# Altium PCB HGD_MCU(v0.1)-20200807.PcbDoc
Units mil, origin at the board's own origin, x right, y up, seen from the top; angles counter-clockwise.
Board outline 2263.78 x 2460.63 mil, 2 copper layers (TopLayer, BottomLayer); 55 components, 43 nets, 248 pads, 448 vias.
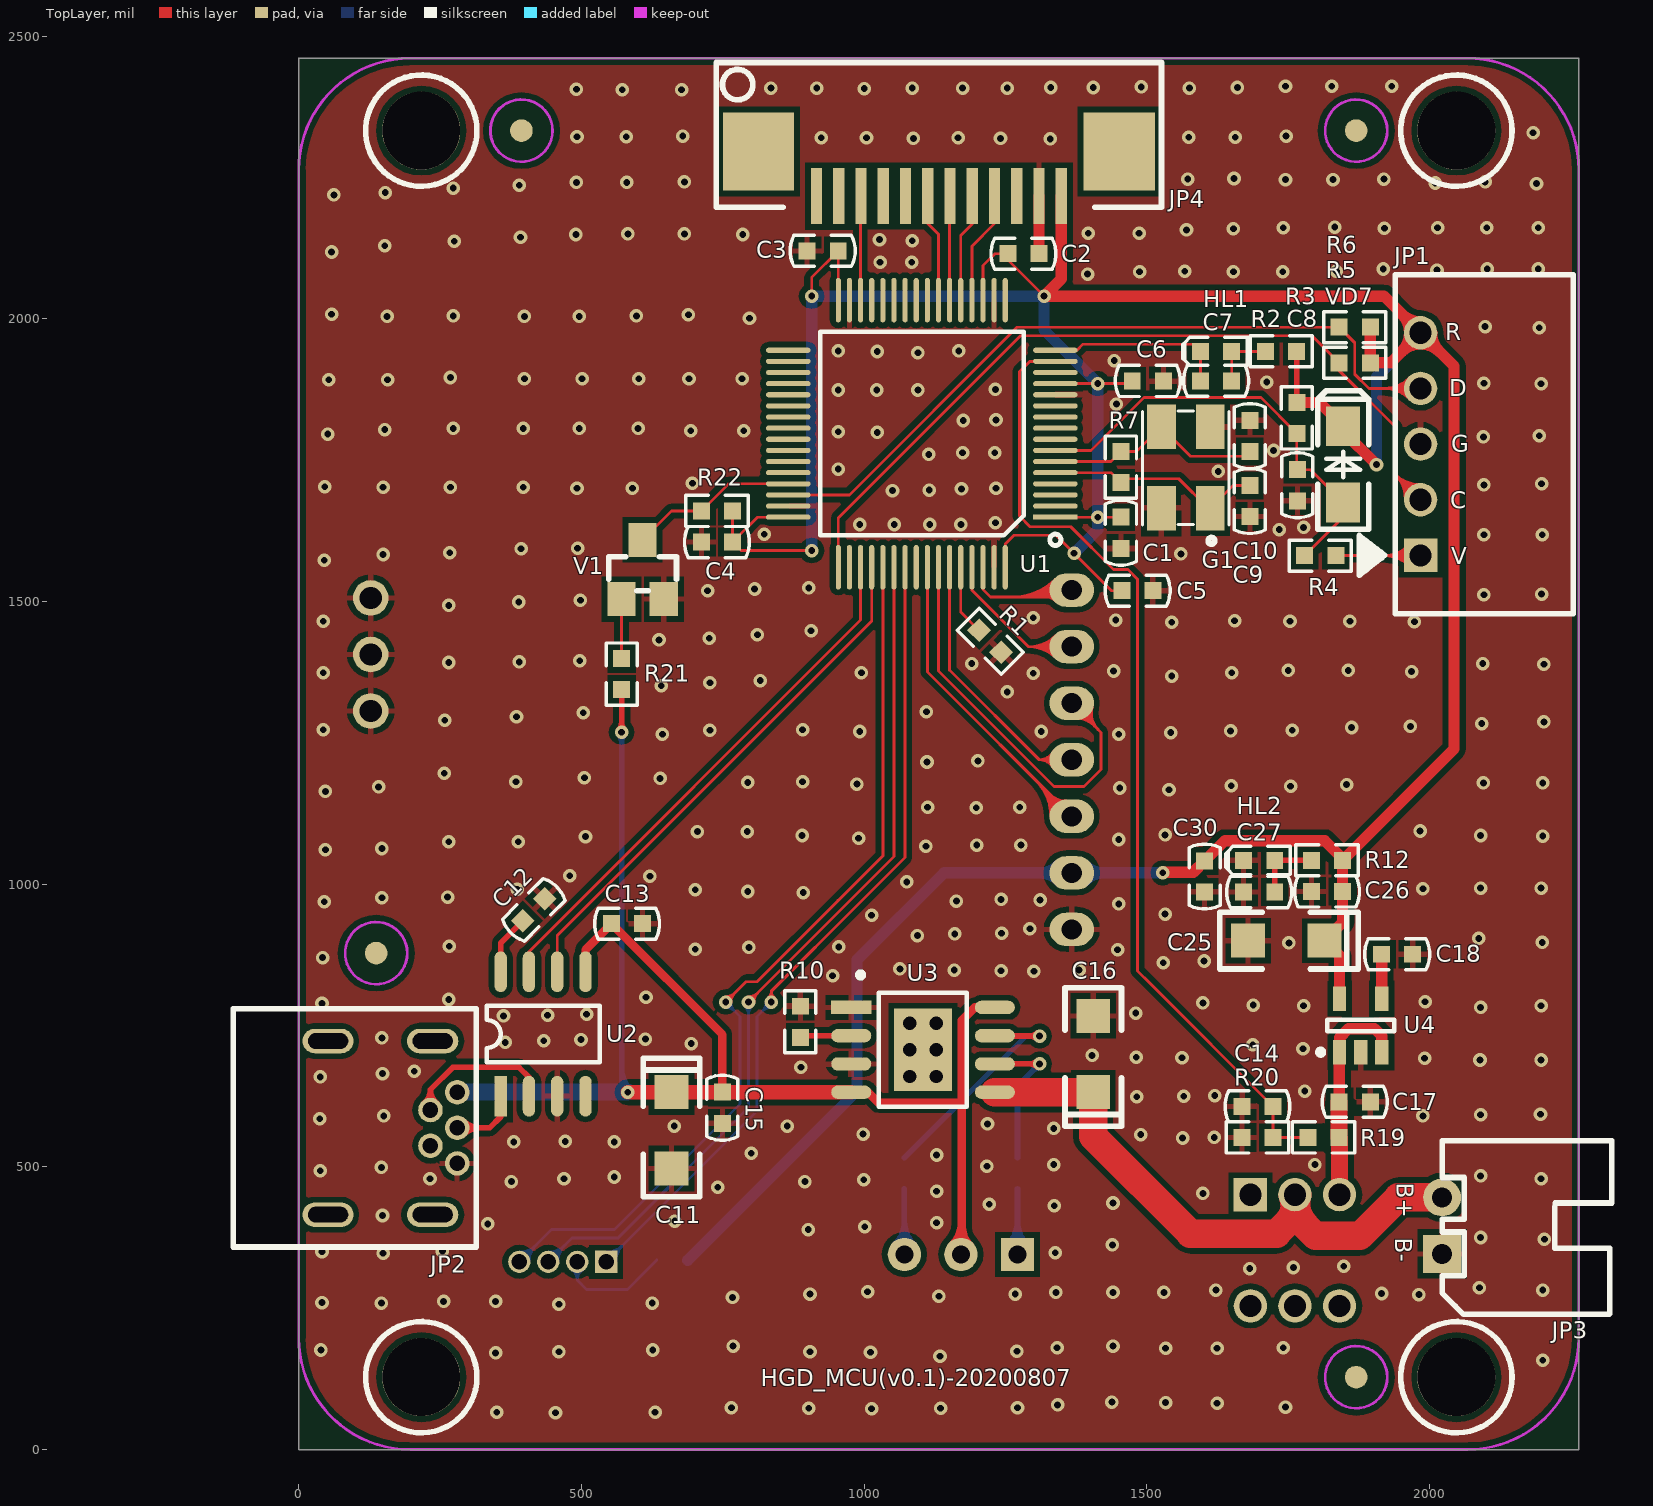
[diagram p0: TopLayer view]
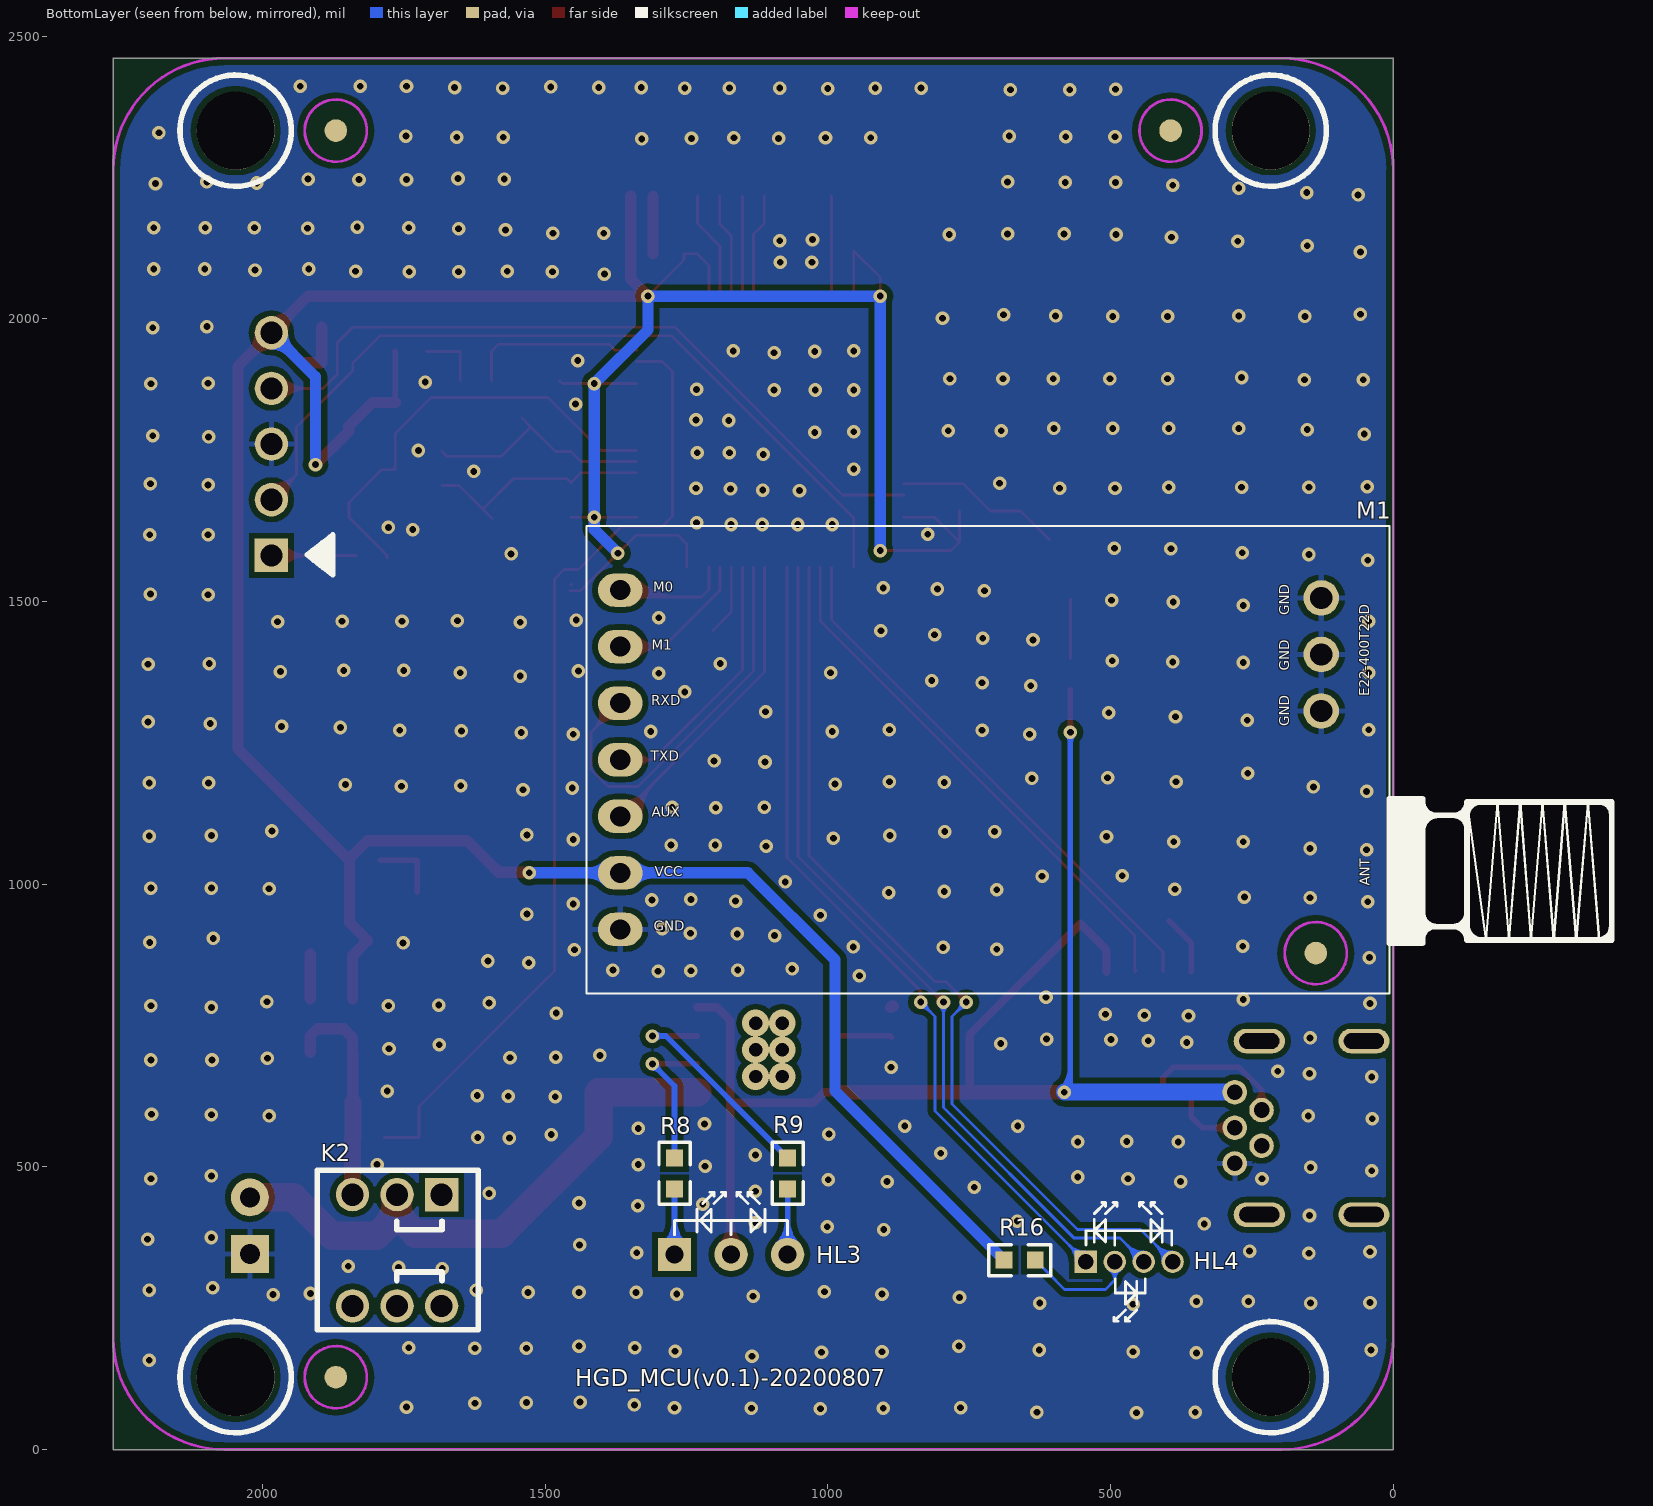
[diagram p1: BottomLayer view, seen from below]

## Layer stack, top to bottom
TopLayer: signal copper 1.4
Dielectric: core 12.6, FR-4, Dk 4.8
BottomLayer: signal copper 1.4

## Board outline
0,0 2263.78,0 2263.78,2460.63 0,2460.63 0,0

## Design rules (kind name [scope] priority, off if disabled: settings)
Clearance Clearance_2 [InNet('RF_IN') vs InNet('GND')] p1: gap=19.68
Clearance [All] p2: gap=10
Clearance Clearance_1 [All] p3: gap=10
ComponentClearance [All] p1 off: gap=10 collisioncheckmode=3 verticalgap=10 showdistances=FALSE
FabricationTestPointUsage TestPointUsage [All] p1: valid=0 allowmultiple=FALSE
FabricationTestpoint Testpoint [(IsPad And (OnTopLayer Or OnBottomLayer))] p1: side=3 testpointundercomponent=TRUE minsize=40 maxsize=100 preferedsize=60 minholesize=20 maxholesize=40 preferedholesize=32 testpointgrid=1 allowsidetop=TRUE allowsidebottom=TRUE usegrid=TRUE gridtolerance=0.01
HoleSize [All] p1: absolutevalues=TRUE maxlimit=200 minlimit=1 maxpercent=80.000 minpercent=20.000
PolygonConnect [IsVia] p1: connectstyle=Direct reliefconductorwidth=10 reliefentries=4 polygonreliefangle="90 Angle"
PolygonConnect PolygonConnect_via [All] p2 off: connectstyle=Relief reliefconductorwidth=10 reliefentries=4 polygonreliefangle="90 Angle"
RoutingVias [All] p1: holewidth=15.75 width=31.5 viastyle="Through Hole" minholewidth=11.81 minwidth=23.62 maxholewidth=19.68 maxwidth=39.37
ShortCircuit [All] p1 off: allowed=FALSE
SilkscreenOverComponentPads [All] p1: minsilkscreentomaskgap=10
SolderMaskExpansion [All] p1: expansion=4
Width [All] p1: maxlimit=100 minlimit=5 preferedwidth=10
22 further rules are at their usual default settings.

## Components (designator, comment, footprint, x,y, rotation, side; value= is the part's Value field where it differs from the comment)
C1 "100nF/25V/5%" C0603 1454,1594 r90 top
C2 "100nF/25V/5%" C0603 1254,2115 r0 top
C3 "100nF/25V/5%" C0603 954,2120 r180 top
C4 "100nF/25V/5%" C0603 712,1605 r0 top
C5 "100nF/25V/5%" C0603 1511,1519 r180 top
C6 "100nF/25V/5%" C0603 1529,1890 r180 top
C7 "100nF/25V/5%" C0603 1649.85,1890.25 r180 top
C8 "100nF/25V/5%" C0603 1766,1733 r270 top
C9 "20pF/25V/1%" C0603 1682,1650 r90 top
C10 "20pF/25V/1%" C0603 1682,1765 r90 top
C11 "10uF/25V/5%" C1206-1 659,632 r270 top
C12 "100nF/25V/5%" C0603 435,974 r225 top
C13 "100nF/25V/5%" C0603 553,930 r0 top
C14 "100nF/25V/5%" C0603 1723,607 r180 top
C15 "100nF/25V/5%" C0603 749,632 r270 top
C16 "10uF/25V/5%" C1206-1 1405,632 r90 top
C17 "100nF/25V/5%" C0603 1840,615 r0 top
C18 "10nF/25V/5%" C0603 1970,876 r180 top
C25 "2.2uF/25V/5%" C1206-1 1814,900 r180 top
C26 "100nF/25V/5%" C0603 1791,987 r0 top
C27 "100nF/25V/5%" C0603 1726,986 r180 top
C30 "100nF/25V/5%" C0603 1602,986 r90 top
G1 "16MHz" OSC5032 1612,1665 r90 top
HL1 "LED蓝灯" LED0603 1649.85,1942.25 r180 top
HL2 "LED蓝灯" LED0603 1726,1042 r180 top
HL3 "LED双色" LED2_Common_Anode 1271,345 r180 bottom locked
HL4 "LED3_RGB" LED3_Common_Anode 543.54,332 r180 bottom
JP1 "SWD" XH2.54-5AW 1984,1483 r90 top
JP2 "MiniUSB-B" MiniUSB-B 280,569 r270 top locked
JP3 "XH2.54-2P" XH2.54-2AW 2022,396 r90 top
JP4 "FPC-12P" FPC-1.0MM-12P-W 1132,2217 r0 top locked
K2 "SW-2" BTN-7*7 1683,254 r0 bottom locked
M1 "E22-400T22D" E22-400T22D 1367,1520 r180 bottom locked
R1 "10K/5%" R0603 1242,1410 r135 top
R2 "10K/5%" R0603 1764.85,1942.25 r180 top
R3 "10K/5%" R0603 1765,1797 r90 top
R4 "1K/5%" R0603 1834,1581 r180 top
R5 "10K/5%" R0603 1840,1922 r0 top
R6 "10K/5%" R0603 1840,1985 r0 top
R7 "1M/1%" R0603 1454,1710 r90 top
R8 "1K/5%" R0603 1271,516 r270 bottom
R9 "1K/5%" R0603 1071,516 r270 bottom
R10 "1K5/5%" R0603 887,784 r270 top
R12 "2K/5%" R0603 1846,1042 r180 top
R16 "10K/5%" R0603 688,335 r180 bottom
R19 "10M/1%" R0603 1840,552 r180 top
R20 "10M/1%" R0603 1723,552 r180 top
R21 "10K/5%" R0603 571,1399 r270 top
R22 "1K/5%" R0603 767,1660 r180 top
U1 "STM32F105RCT6" LQFP64_STM32F105R 1338,1649 r180 top locked
U2 "CH340N" CH340N_SOP8 357,625 r0 top
U3 "TP4056" TP4056_SOP8_SOP127P600X175-8N 1104,707 r0 top
U4 "TPS73033DBVR" SGM2019_SOT23-5_95P280X125-5N 1878,750 r90 top
V1 "S8050" SOT-23 608,1609 r0 top
VD7 "1N4148" LL-34 1847,1675 r90 top

## Footprints (in the part's own frame and the unit in brackets; to place one, negate y for a bottom-side part, rotate by r counter-clockwise, add the part's x,y. Pads: shape width x height; smd on the part's side, far side on the other; paste and mask are expansions set on the pad)
BTN-7*7 [mm] "自锁开关"
  rect 1.5x1.5 hole 1: 1(0,-5)
  round 1.5 hole 1: 2(2,-5) 3(4,-5) 4(0,0) 5(2,0) 6(4,0)
  silkscreen extent -1.65,-6.1 5.59,1.07
C0603 [mil]
  rect 30x30 smd: 1(0,0) 2(55,0)
  silkscreen extent -30,-28 85,28
C1206-1 [mil] "C1206封装钽电容"
  rect 60x60 smd: 1(0,0) 2(135,0)
  silkscreen extent -60,-50 185,50
CH340N_SOP8 [mil]
  rect 22x72 smd: 1(0,0)
  oval 22x72 smd: 2(50,0) 3(100,0) 4(150,0) 5(150,220) 6(100,220) 7(50,220) 8(0,220)
  silkscreen extent -25,60 175,160
E22-400T22D [mm]
  oval 2x1.5 hole 0.9: 1(0,0) 2(0,-2.54) 3(0,-5.08) 4(0,-7.62) 5(0,-10.16) 6(0,-12.7) 7(0,-15.24)
  round 1.6 hole 1: 8(31.49,-5.43) 9(31.49,-2.89) 10(31.49,-0.35)
  silkscreen extent -1.51,-18.12 44.54,2.88
FPC-1.0MM-12P-W [mm] "FPC-1.0MM-12P-W：卧式，抽拉式上接，12P"
  rect 3.2x3.5 smd: 0(-8.1,2) 0(8.1,2)
  rect 0.5x2.5 smd: 1(-5.5,0) 2(-4.5,0) 3(-3.5,0) 4(-2.5,0) 5(-1.5,0) 6(-0.5,0) 7(0.5,0) 8(1.5,0) 9(2.5,0) 10(3.5,0) 11(4.5,0) 12(5.5,0)
  silkscreen extent -10,-0.5 10,6
LED2_Common_Anode [mm] "LED2_Common_Anode：双色3mm共阳极LED"
  rect 1.5x1.5 hole 0.8: 1(0,0)
  round 1.5 hole 0.8: 2(2.54,0) 3(5.08,0)
  silkscreen extent 0,0.89 5.08,2.79
LED3_Common_Anode [mm] "LED2_Common_Anode：三色5mm共阳极LED"
  rect 1x1 hole 0.7: 1(0,0)
  round 1 hole 0.7: 2(1.3,0) 3(2.6,0) 4(3.9,0)
  silkscreen extent 0,-2.67 3.86,2.67
LED0603 [mil]
  rect 30x30 smd: A(0,0) K(55,0)
  silkscreen extent -28,-25 87,25
LL-34 [mil] "开关二极管LL-34封装"
  rect 70x60 smd: A(0,0) K(135,0)
  silkscreen extent -48,-45 198,45
LQFP64_STM32F105R [mm]
  rect 2x0.229 smd: 1(0,0)
  oval 2x0.229 smd: 2(0,-0.5) 3(0,-1) 4(0,-1.5) 5(0,-2) 6(0,-2.5) 7(0,-3) 8(0,-3.5) 9(0,-4) 10(0,-4.5) 11(0,-5) 12(0,-5.5) 13(0,-6) 14(0,-6.5) 15(0,-7) 16(0,-7.5) 33(12,-7.5) 34(12,-7) 35(12,-6.5) 36(12,-6) 37(12,-5.5) 38(12,-5) 39(12,-4.5) 40(12,-4) 41(12,-3.5) 42(12,-3) 43(12,-2.5) 44(12,-2) 45(12,-1.5) 46(12,-1) 47(12,-0.5) 48(12,0)
  oval 0.229x2 smd: 17(2.25,-9.75) 18(2.75,-9.75) 19(3.25,-9.75) 20(3.75,-9.75) 21(4.25,-9.75) 22(4.75,-9.75) 23(5.25,-9.75) 24(5.75,-9.75) 25(6.25,-9.75) 26(6.75,-9.75) 27(7.25,-9.75) 28(7.75,-9.75) 29(8.25,-9.75) 30(8.75,-9.75) 31(9.25,-9.75) 32(9.75,-9.75) 49(9.75,2.25) 50(9.25,2.25) 51(8.75,2.25) 52(8.25,2.25) 53(7.75,2.25) 54(7.25,2.25) 55(6.75,2.25) 56(6.25,2.25) 57(5.75,2.25) 58(5.25,2.25) 59(4.75,2.25) 60(4.25,2.25) 61(3.75,2.25) 62(3.25,2.25) 63(2.75,2.25) 64(2.25,2.25)
  silkscreen extent -0.25,-8.32 10.57,1.27
MiniUSB-B [mm]
  oval 1.1x2.3 hole 0.7 slot 1.8 at 90 deg: 0(-3.9,-1.1) 0(-3.9,-5.8) 0(3.9,-1.1) 0(3.9,-5.8)
  round 1.1 hole 0.7: 1(-1.6,0) 2(-0.8,-1.2) 3(0,0) 4(0.8,-1.2) 5(1.6,0)
  silkscreen extent -5.35,-10.05 5.35,0.85
OSC5032 [mm]
  rect 2x1.3 smd: 1(0,0) 2(3.65,0) 3(3.65,2.2) 4(0,2.2)
  silkscreen extent -1.62,-0.84 4.37,3.05
R0603 [mil]
  rect 30x30 smd: 1(0,0) 2(55,0)
  silkscreen extent -28,-28 82,28
SGM2019_SOT23-5_95P280X125-5N [mm] "SOT23, 5-Leads, Body 3.0x3.0mm (max), Pitch 0.95mm, IPC Medium Density"
  rect 1.1x0.6 smd: 1(-1.2,0.95) 2(-1.2,0) 3(-1.2,-0.95) 4(1.2,-0.95) 5(1.2,0.95)
  silkscreen extent -1.32,-1.5 0.25,1.92, body extent -0.85,-1.51 0.85,1.51, height 1.25
SOT-23 [mil]
  rect 50x60 smd: B(-37.5,-105) C(0,0) E(37.5,-105)
  silkscreen extent -60,-90 60,-30
TP4056_SOP8_SOP127P600X175-8N [mm] "SOP, 8-Leads, Body 5.1x4.0mm (max), Pitch 1.27mm, IPC Medium Density"
  rect 2.6x3.7 smd: 0(0,0)
  rect 1.8x0.6 smd: 1(-3.225,1.905)
  oval 1.8x0.6 smd: 2(-3.225,0.635) 3(-3.225,-0.635) 4(-3.225,-1.905) 5(3.225,-1.905) 6(3.225,-0.635) 7(3.225,0.635) 8(3.225,1.905)
  silkscreen extent -2.93,-2.57 1.96,3.49, body extent -2,-2.55 2,2.55, height 1.75
XH2.54-2AW [mm] "2.54mm间距, 2P, 弯针插座"
  rect 1.7x1.7 hole 0.9: 1(-1.27,0)
  round 1.7 hole 0.9: 2(1.27,0)
  silkscreen extent -3.99,-7.62 3.81,0, body extent -3.77,-7.35 3.77,0.35, height 5.73
XH2.54-5AW [mm] "XH2.54-5P弯针插座"
  rect 1.5x1.5 hole 1: 1(2.5,0)
  round 1.5 hole 1: 2(5,0) 3(7.5,0) 4(10,0) 5(12.5,0)
  silkscreen extent -0.13,-6.86 15.1,2.75

## Part data
C1 C2 C3 C4 C5 C6 C8: library part CAP-SMD, "电容"
C7 C9 C10 C27: library part CAP, "电容"
C11 C16 C25: library part "Cap Pol1", "钽电容"
C12 C13 C15 C18 C26 C30: library part Cap, "电容"
C14 C17: library part CAP-SMD
G1: library part CRYSTAL_4, "两对电极压电晶体"
HL1 HL2: library part 发光二极管, "发光二极管"
HL3: library part LED2_Common_Anode, "LED2_Common_Anode：双色LED，共阳极"
HL4: library part LED3_Common_Anode, "LED3_Common_Anode：三色共阳极LED"
JP1: library part JP_XH2.54-5AW, "XH2.54-5P直插插针"
JP2: "MiniUSB-B母头插座"
JP3: library part XH2.54-2AW, "XH2.54-2P弯针插座"
K2: "SW-2：2通道自锁开关"
M1: "E22-400T22D LoRa模块"
R1 R2 R3 R4 R5 R6 R7 R8 R9 R10 R12 R16 R19 R20 R21 R22: library part RES2, "电阻"
U4: library part SGM2019, "SGM2019：Low Power, Low Dropout, RF Linear Regulators"
V1: library part NPN, "NPN三极管"
VD7: library part 开关二极管, "开关二极管"

## Free pads (board coordinates)
  round 40 smd far side: 0(136.81,877.95) 0(393.7,2332.68) 0(1870.08,2332.68) 0(1870.08,127.95)
  round 137.8 hole 137.8: 0(216.54,127.95) 0(216.54,2332.68) 0(2047.24,127.95) 0(2047.24,2332.68)
  round 40 smd: 1(136.81,877.95) 1(393.7,2332.68) 1(1870.08,2332.68) 1(1870.08,127.95)
  round 100 on Bottom Solder: 2(136.81,877.95) 2(393.7,2332.68) 2(1870.08,2332.68) 2(1870.08,127.95)
  round 100 on Top Solder: 3(136.81,877.95) 3(393.7,2332.68) 3(1870.08,2332.68) 3(1870.08,127.95)

## Via types
v1: diameter 24, hole 12, TopLayer to BottomLayer, tented both sides, 442 vias
v2: diameter 47.24, hole 23.62, TopLayer to BottomLayer, tented both sides, 6 vias

## Nets (pads, with @x,y where several pads share a name; then routed paths per layer and width w, separated by ;. In a path a pad name is that pad's centre, name@x,y a point inside that pad or via, vN(x,y) a via of type N, cw(c..) or ccw(c..) an arc to the next point about the centre after c; other vN are vias at no path point)
3V3: C1.2 C2.1 C3.1 C4.2 C5.2 C6.2 C25.1 C26.2 C30.2 JP1.5 JP4.12 M1.6 R2.1 R3.2 R5.2 R6.2 R12.1 R16.1 R22.1 U1.1 U1.13 U1.19 U1.32 U1.48 U1.64 U4.5 VD7.K | length 7616.8
  TopLayer w5: R22.1 C4.2 ; U1.48 811,1649 C4.2 ; v1(907,1590) 782,1590 C4.2 ; v1(907,2040) 907,2073 C3.1 954.14,2119.86 U1.32 ; U1.19 1210.05,2093.91 1231.14,2115 C2.1 1254,2104 v1(1318,2040) ; U1.64 1249.42,1601.42 1265,1617 1339.28,1617 v1(1371.14,1585.14) 1437.28,1519 C5.2 ; U1.1 v1(1413,1649) C1.2 ; U1.13 v1(1413,1885.22) 1469.22,1885.22 C6.2 ; C5.2@1454,1529 C5.2@1454,1530.45
  TopLayer w10: R2.1 1764.85,1852.15 R3.2
  TopLayer w20: JP4.12 1348.54,2070.54 v1(1318,2040) 1919.13,2040 JP1.5 ; v1(1528,1020) 1529,1021 1582,1021 C30.2 1638,1077 1814.28,1077 1846,1045.28 R12.1 ; R3.2 1805,1852 VD7.K 1847,1801 v1(1906,1742) ; U4.5 1840.6,873.4 C25.1 1846,932 C26.2 R12.1 ; R6.2 R5.2 1930.87,1922 JP1.5 ; JP1.5@1984,1994.65 cw(c1984,2041.8) 1950.66,2008.46 cw(c1917.33,1975.13) 1964.47,1975.13 cw(c1917.33,1975.13) 1950.66,1941.79 cw(c1984,1908.45) 1984,1955.6 cw(c1984,1908.45) 2017.34,1941.79 cw(c2050.67,1975.13) JP1.5@2003.53,1975.13 ; R12.1 2043,1239 2043,1916.13 JP1.5
  BottomLayer w20: R16.1 987.2,634.2 987.2,866.14 1141.06,1020 M1.6 v1(1528,1020) ; v1(907,1590) v1(907,2040) v1(1318,2040) 1318,1980.22 v1(1413,1885.22) v1(1413,1649) 1413,1627 v1(1371.14,1585.14) ; M1.6@1343.35,1006.19 ccw(c1310.01,972.86) 1310.01,1020 ccw(c1310.01,1067.14) M1.6@1343.35,1033.81 ; M1.6@1390.65,1006.19 cw(c1423.99,972.86) 1423.99,1020 cw(c1423.99,1067.14) M1.6@1390.65,1033.81 ; v1(1906,1742) 1906,1897.13 JP1.5 ; JP1.5@1964.47,1975.13 cw(c1917.33,1975.13) 1950.66,1941.79 cw(c1984,1908.45) JP1.5@1984,1955.6
+5V: C11.1 C13.1 C15.1 HL3.2 JP2.1 R21.2 U2.5 U3.4 U3.8 | length 2825.8
  TopLayer w10: v1@565.92,1273.65 ccw(c553.64,1285.92) 571,1285.92 ; v1(570.87,1268.7) 571,1268.83 R21.2 ; 571,1285.28 ccw(c587.44,1285.28) v1@575.82,1273.65
  TopLayer w15: U2.5 507,884 C13.1 ; 581.69,901.31 C13.1 ; C15.1 749,734 C13.1 ; U3.4 1006.78,632 1025.59,613.19 1172.68,613.19 ; HL3.2@1155.42,360.58 ccw(c1113.76,402.24) 1172.68,402.24 ; HL3.2 1172.68,346.68 1172.68,625.44 1172.68,759.3 1195.39,782 U3.8 ; 1172.68,394.12 ccw(c1220.12,394.12) HL3.2@1186.58,360.58
  TopLayer w25: v1(581.69,631.89) 581.8,632 C11.1 C15.1 U3.4
  BottomLayer w10: v1@565.92,1263.75 cw(c553.97,1251.8) 570.87,1251.8 cw(c587.77,1251.8) v1@575.82,1263.75 ; 570.87,650.79 ccw(c600.59,650.79) v1@579.57,629.77 ; 570.87,674.93 ccw(c624.73,674.93) v1@586.64,636.84 ; v1(570.87,1268.7) 570.87,642.72 581.59,631.99 v1(581.69,631.89)
  BottomLayer w30: JP2.1 v1@581.59,631.99
ADC_CO: JP4.8 U1.21 | length 192.6
  TopLayer w5: U1.21 1170.68,2146.95 1191.06,2167.32 JP4.8
ADC_H2S: JP4.7 U1.22 | length 184.4
  TopLayer w5: U1.22 1150.99,2216.31 JP4.7
ADC_LEL: JP4.6 U1.23 | length 192
  TopLayer w5: JP4.6 1112.32,2168.31 1131.31,2149.31 U1.23
ADC_O2: JP4.9 U1.20 | length 200.7
  TopLayer w5: U1.20 1190.36,2128.24 1230.43,2168.31 JP4.9
ADC_VOLT: C14.1 R19.2 R20.1 U1.15 | length 1739.8
  TopLayer w5: U1.15 1292.7,1924.59 1274.61,1906.5 1274.61,1650.85 1293.45,1632 1365.14,1632 1440.64,1556.5 1466.18,1556.5 1483.5,1539.18 1483.5,846.5 1505.36,824.64 ; 1498.5,831.5 1505.36,824.64 ; R19.2 R20.1 C14.1 1505.36,824.64
BATT+: C16.1 JP3.2 K2.2 U3.5 | length 1144.7
  TopLayer w50: U3.5 C16.1 1405,553.66 1576.77,381.89 1729.33,381.89 1761.74,414.3 K2.2 ; 1747.61,400.17 ccw(c1715.62,432.16) K2.2@1757.54,449.15 ; 1761.74,414.44 1798.23,377.95 1876.53,377.95 1944.57,446 JP3.2 ; K2.2@1766.1,449.62 ccw(c1818.62,434.76) 1780.02,396.16
BATT_OUT: C17.1 K2.3 R19.1 U4.1 U4.3 | length 393.4
  TopLayer w20: C17.1 1840,702.16 U4.1 1840.6,728.39 1856.61,744.41 1902.24,744.41 1915.4,731.25 U4.3
  TopLayer w30: C17.1 R19.1 1840.48,551.52 K2.3
BEEP: JP4.3 U1.30 | length 184.4
  TopLayer w5: U1.30 993.51,2216.31 JP4.3
BOOT0: R1.2 U1.60 | length 125
  TopLayer w5: U1.60 1170.68,1481.32 R1.2
CHECK_POWER: R22.2 U1.45 V1.C | length 298.6
  TopLayer w5: V1.C 659,1660 R22.2 760,1708 865.5,1708 U1.45
DEBUG_RX: U1.52 U2.6 | length 949.3
  TopLayer w5: U2.6@454.5,847.5 U2.6 457,909.21 1013.2,1465.41 U1.52
DEBUG_TX: U1.51 U2.7 | length 958.4
  TopLayer w5: U2.7 407,880.43 993.51,1466.94 U1.51
DGND: C1.1 C2.2 C3.2 C4.1 C5.1 C6.1 C8.2 C9.1 C10.2 C11.2 C12.1 C13.2 C14.2 C15.2 C16.2 C17.2 C18.1 C25.2 C26.1 C27.2 C30.1 G1.2 G1.4 HL2.K JP1.3 JP2.5 JP3.1 JP4.11 M1.7 M1.8 M1.9 M1.10 R1.1 R10.1 R20.2 U1.12 U1.18 U1.31 U1.47 U1.63 U2.3 U3.1 U3.3 U4.2 V1.E | length 108.2
  TopLayer w20: R10.1@883.72,784 R10.1 R10.1@889,782 ; C2.2 1309.17,2115.17 JP4.11
  other v1: 454,65 350,66 630,66 1013,72 902,73 1135,73 765,74 1271,74 1745,75 1342,79 1624,82 1533,83 1438,84 2200,158 1134,165 348,171 1011,172 460,173 904,173 1270,174 39,176 626,176 1533,179 1624,179 1341,180 1741,180 768,183 1440,183 460,257 146,259 625,259 41,260 256,262 348,262 767,269 1132,271 1981,274 904,275 1267,275 1915,276 1339,278 1440,278 1530,278 1006,279 1622,282 2200,282 2088,286 1682,320 1759,322 1848,324 149,347 1338,348 41,350 254,351 1439,362 2203,372 2090,375 901,389 1001,394 334,399 1128,401 665,404 148,414 1336,431 1221,434 1440,436 1599,453 1128,457 741,464 376,474 895,474 999,477 232,479 469,479 2197,479 558,482 2090,484 38,493 146,499 1217,501 1335,504 1797,504 1128,521 800,524 380,544 558,544 471,545 1563,551 1619,552 1489,557 998,558 1335,568 664,572 864,572 1218,576 37,585 150,590 1988,590 2090,592 2196,593 1482,624 1565,625 1620,626 1779,634 38,659 148,665 204,669 888,676 2089,689 2197,689 1991,692 1562,693 1481,694 1403,697 1776,709 1687,716 694,718 365,720 433,723 499,725 613,726 147,728 362,767 440,768 509,770 1480,772 2090,782 1777,785 2197,785 1688,786 41,789 1599,790 1992,792 265,796 614,800 944,838 1300,846 1242,847 1159,848 1380,848 1063,850 1529,861 1601,864 42,870 1448,884 701,885 796,888 955,889 266,890 1751,896 2199,897 2087,904 1094,909 1160,912 1243,913 1293,921 1013,945 1532,947 1450,965 45,969 1163,970 1311,972 1242,973 147,976 263,977 892,985 794,987 701,990 386,991 1988,992 2090,993 2197,993 1075,1004 621,1014 479,1015 47,1061 147,1063 1109,1067 1199,1069 1277,1069 265,1075 388,1075 1450,1079 990,1081 507,1084 2200,1085 890,1086 2090,1086 1532,1087 705,1093 793,1093 1983,1094 1198,1135 1112,1136 1275,1136 47,1164 1539,1167 1452,1170 141,1172 1754,1173 1649,1174 1853,1176 987,1177 2095,1179 2200,1179 794,1180 384,1181 891,1181 639,1187 505,1188 257,1196 1111,1216 1201,1218 643,1265 1450,1265 1542,1268 992,1270 1313,1270 1648,1271 727,1272 1757,1272 43,1273 891,1273 1862,1277 1966,1279 2092,1284 2202,1287 258,1290 385,1296 503,1303 1110,1305 1253,1340 641,1351 727,1356 816,1360 1544,1368 1299,1373 43,1374 995,1374 1650,1374 1968,1376 1441,1377 1750,1378 1856,1378 2202,1389 1190,1390 2094,1390 265,1392 390,1393 497,1395 637,1432 726,1435 811,1441 906,1448 1544,1463 1973,1464 43,1465 1753,1465 1859,1465 1655,1466 1445,1467 1299,1471 265,1493 389,1499 498,1502 2096,1512 2198,1513 723,1519 806,1522 902,1524 45,1573 149,1583 1560,1584 267,1586 393,1593 493,1594 2096,1618 2199,1618 823,1619 1734,1627 1777,1631 992,1636 1053,1636 1116,1636 1171,1636 1232,1639 1050,1696 1115,1697 1172,1699 492,1700 590,1700 1233,1700 149,1702 268,1702 397,1702 46,1703 2096,1706 2198,1708 696,1709 1626,1730 954,1734 1114,1760 1174,1763 1231,1763 1724,1767 2095,1791 2194,1793 51,1796 1023,1799 954,1800 693,1802 787,1802 152,1804 273,1806 397,1806 496,1806 600,1806 1175,1820 1233,1821 1446,1849 954,1874 1022,1874 1095,1874 1232,1875 2197,1885 2096,1886 1712,1888 53,1892 157,1892 399,1894 501,1894 601,1894 690,1894 784,1894 268,1896 1442,1926 1095,1940 1023,1942 954,1943 1167,1943 2194,1984 2098,1986 797,2001 156,2004 399,2004 496,2004 273,2005 597,2005 689,2007 58,2008 1395,2079 1487,2083 1653,2083 1740,2083 1567,2084 1835,2084 2013,2086 1918,2088 2102,2088 2192,2088 1028,2100 1084,2100 58,2118 152,2129 275,2137 1085,2138 1027,2140 392,2144 490,2149 785,2149 582,2150 682,2150 1396,2151 1486,2151 1570,2157 1653,2159 1920,2160 1741,2161 2014,2161 2101,2161 2192,2161 1832,2162 62,2219 153,2223 273,2231 390,2236 2189,2239 2010,2240 491,2241 580,2241 682,2242 2098,2242 1745,2246 1829,2246 1572,2247 1919,2247 1654,2248 1329,2318 1087,2319 1241,2319 924,2320 1004,2320 1166,2320 1574,2321 1656,2321 492,2322 579,2322 679,2323 1746,2323 2183,2329 572,2405 677,2405 491,2406 1000,2407 835,2408 916,2408 1085,2408 1174,2408 1253,2408 1575,2408 1330,2409 1405,2409 1660,2409 1490,2410 1745,2411 1827,2411 1933,2411
E22_AUX: M1.5 U1.57 | length 1169.2
  TopLayer w5: U1.57 1111.62,1375.38 M1.5 ; 1304.06,1182.94 cw(c1241.12,1120) 1330.13,1120 ccw(c1241.12,1120) 1304.06,1182.94 ; 1312.59,1174.41 cw(c1258.19,1120) 1335.13,1120 ccw(c1258.19,1120) 1312.59,1174.41 ; 1321.13,1165.87 cw(c1275.26,1120) 1340.13,1120 ccw(c1275.26,1120) 1321.13,1165.87 ; 1327.82,1159.18 ccw(c1357.16,1188.52) 1357.16,1147.03 cw(c1357.16,1188.52) 1327.82,1159.18 ; 1329.67,1157.33 cw(c1292.33,1120) 1345.13,1120 ccw(c1292.33,1120) 1329.67,1157.33 ; 1336.36,1150.64 ccw(c1357.16,1171.44) 1357.16,1142.03 cw(c1357.16,1171.44) 1336.36,1150.64 ; 1338.2,1148.8 cw(c1309.4,1120) 1350.13,1120 ccw(c1309.4,1120) 1338.2,1148.8
  TopLayer w9: M1.5 M1.5@1367,1122.1
E22_M0: M1.1 U1.62 | length 585.8
  TopLayer w5: U1.62 1210.05,1521.19 1223.36,1507.87 1354.87,1507.87 M1.1 ; 1262.63,1507.87 ccw(c1262.63,1614.52) M1.1@1338.05,1539.11 ; 1274.7,1507.87 ccw(c1274.7,1602.45) M1.1@1341.58,1535.58 ; 1286.77,1507.87 ccw(c1286.77,1590.38) M1.1@1345.12,1532.04 ; 1298.85,1507.87 ccw(c1298.85,1578.31) M1.1@1348.65,1528.5 ; 1310.92,1507.87 ccw(c1310.92,1566.24) M1.1@1352.19,1524.97 ; 1321.18,1507.87 cw(c1321.18,1484.02) M1.1@1338.05,1500.89 ; 1322.99,1507.87 ccw(c1322.99,1554.17) M1.1@1355.72,1521.43
E22_M1: M1.2 U1.61 | length 509.3
  TopLayer w5: U1.61 1190.36,1519.66 1290.02,1420 M1.2 ; M1.2@1338.05,1400.89 ccw(c1291.91,1354.75) 1291.91,1420 ccw(c1291.91,1485.25) M1.2@1338.05,1439.11 ; M1.2@1341.58,1404.42 ccw(c1303.98,1366.82) 1303.98,1420 ccw(c1303.98,1473.18) M1.2@1341.58,1435.58 ; M1.2@1345.12,1407.96 ccw(c1316.05,1378.89) 1316.05,1420 ccw(c1316.05,1461.11) M1.2@1345.12,1432.04
E22_RX: M1.4 U1.59 | length 607.9
  TopLayer w5: U1.59 1150.99,1378.43 1309.43,1220 ; M1.4@1333.98,1206.1 ccw(c1309.43,1191.37) 1309.43,1220 ; M1.4@1333.98,1233.9 cw(c1309.43,1248.63) 1309.43,1220 ; M1.4@1338.27,1208.67 ccw(c1318.26,1196.67) 1318.26,1220 ccw(c1318.26,1243.33) M1.4@1338.27,1231.33 ; M1.4@1342.56,1211.24 ccw(c1327.09,1201.96) 1327.09,1220 ccw(c1327.09,1238.04) M1.4@1342.56,1228.76 ; M1.4 1309.43,1220
E22_TX: M1.3 U1.58 | length 905
  TopLayer w5: U1.58 1131.31,1376.91 1335.8,1172.41 1388.69,1172.41 1418.87,1202.59 1418.87,1268.13 M1.3 ; M1.3@1376.84,1292.97 cw(c1376.84,1251.48) 1406.18,1280.82 ; M1.3@1376.84,1297.97 cw(c1376.84,1268.56) 1397.64,1289.36 ; M1.3@1388.49,1316.98 ccw(c1414.14,1310.34) 1395.4,1291.6 ; M1.3@1393.33,1315.73 ccw(c1423.96,1307.79) 1401.58,1285.42 ; M1.3@1398.17,1314.47 ccw(c1433.78,1305.25) 1407.76,1279.24 ; M1.3@1403.01,1313.22 ccw(c1443.6,1302.7) 1413.95,1273.05
MCU_LED: C7.2 HL1.K U1.16 | length 318.6
  TopLayer w5: U1.16 1376.27,1944.27 1387,1955 1582.1,1955 1592.83,1944.27 HL1.K C7.2
NetC7_1: C7.1 HL1.A R2.2 | length 112
  TopLayer w5: C7.1 HL1.A R2.2
NetC12_2: C12.2 U2.8 | length 106.3
  TopLayer w10: U2.8 357,896 C12.2
NetC18_2: C18.2 U4.4 | length 78.9
  TopLayer w20: C18.2 1915.4,875.6 U4.4
NetC27_1: C27.1 HL2.A R12.2 | length 121
  TopLayer w10: C27.1 HL2.A R12.2
NetHL3_1: HL3.1 R8.2 | length 264.1
  BottomLayer w10: HL3.1@1253.66,362.34 ccw(c1211.79,404.21) 1271,404.21 ccw(c1330.21,404.21) HL3.1@1288.34,362.34 ; HL3.1@1260.73,355.27 ccw(c1235.93,380.07) 1271,380.07 ccw(c1306.07,380.07) HL3.1@1281.27,355.27 ; HL3.1 R8.2
NetHL3_3: HL3.3 R9.2 | length 264.1
  BottomLayer w10: HL3.3@1053.66,362.34 ccw(c1011.78,404.21) 1071,404.21 ccw(c1130.21,404.21) HL3.3@1088.34,362.34 ; HL3.3@1060.73,355.27 ccw(c1035.93,380.07) 1071,380.07 ccw(c1106.07,380.07) HL3.3@1081.27,355.27 ; HL3.3 R9.2
NetHL4_2: HL4.2 R16.2 | length 274.4
  BottomLayer w5: HL4.2@482.74,317.76 cw(c470.49,299.64) 492.36,299.64 ; HL4.2@485.54,321.91 cw(c476.85,309.05) 492.36,309.05 cw(c507.87,309.05) HL4.2@499.19,321.91 ; HL4.2 492.36,299.64 ; HL4.2@501.99,317.76 ccw(c514.24,299.64) 492.36,299.64 ; R16.2 611.66,313.66 581,283 509,283 492.36,299.64
NetJP1_1: JP1.1 R4.1 | length 424.7
  TopLayer w5: R4.1 1983.57,1581 JP1.1 ; 1917.72,1581 ccw(c1917.72,1647.7) JP1.1@1964.89,1600.54 ; 1919.78,1581 cw(c1919.78,1517.2) JP1.1@1964.89,1562.31 ; 1929.79,1581 ccw(c1929.79,1635.63) JP1.1@1968.42,1597 ; 1931.85,1581 cw(c1931.85,1529.27) JP1.1@1968.42,1565.85 ; 1941.87,1581 ccw(c1941.87,1623.56) JP1.1@1971.96,1593.47 ; 1943.92,1581 cw(c1943.92,1541.34) JP1.1@1971.96,1569.38 ; 1953.94,1581 ccw(c1953.94,1611.49) JP1.1@1975.5,1589.93
NetR8_1: R8.1 U3.6 | length 314.5
  TopLayer w10: U3.6 1231.06,682.09 v1(1310.04,682.09) ; v1@1305.09,677.14 ccw(c1293.14,665.19) 1293.14,682.09 ccw(c1293.14,698.99) v1@1305.09,687.04
  BottomLayer w10: R8.1 1271,643.05 v1(1310.04,682.09) ; v1@1303.04,682.09 cw(c1286.14,682.09) 1298.09,670.14 cw(c1310.04,658.19) v1@1310.04,675.09
NetR9_1: R9.1 U3.7 | length 460.7
  TopLayer w10: U3.7 1231.67,731.3 v1(1310.04,731.3) ; v1@1305.09,726.35 ccw(c1293.14,714.4) 1293.14,731.3 ccw(c1293.14,748.2) v1@1305.09,736.25
  BottomLayer w10: R9.1 1286.3,731.3 v1(1310.04,731.3) ; v1@1305.09,726.35 ccw(c1293.14,714.4) 1293.14,731.3 ccw(c1293.14,748.2) v1@1305.09,736.25
NetR10_2: R10.2 U3.2 | length 91.3
  TopLayer w10: R10.2 890,732 U3.2
NetR21_1: R21.1 V1.B | length 105.2
  TopLayer w5: V1.B 570.5,1399.5 R21.1
OSC_IN: C9.2 G1.1 R7.1 U1.5 | length 417.7
  TopLayer w5: U1.5 1436.26,1727.74 R7.1 1460.87,1716.87 1556.15,1716.87 1608.02,1665 G1.1 ; G1.1@1594,1647 G1.1 ; C9.2 1652,1705 G1.1
OSC_OUT: C10.1 G1.3 R7.2 U1.6 | length 416.3
  TopLayer w5: U1.6 1436.42,1747.42 R7.2 1481.68,1765 G1.3 ; G1.3@1541,1824.32 G1.3 ; C10.1 1673.83,1756.83 1577.26,1756.83 G1.3
RESET: C8.1 R3.1 R4.2 U1.7 VD7.A | length 790.8
  TopLayer w5: U1.7 1401.16,1767.11 1494.62,1860.57 1701.43,1860.57 R3.1 1765,1734 C8.1 ; C8.1@1766,1737.34 C8.1 ; R4.2@1779,1577 R4.2@1781,1579 ; R4.2 1847,1649 VD7.A 1789,1733 C8.1
SOC0: HL4.1 U1.55 | length 1621.6
  TopLayer w5: v1@829.89,798.91 ccw(c821.1,810.48) 835.63,810.48 ; v1(835.63,791.34) 835.63,810.48 ; v1@841.37,798.91 cw(c850.16,810.48) 835.63,810.48 ; U1.55 1072.25,1047.1 993.51,968.36 835.63,810.48
  BottomLayer w5: HL4.1 810.28,598.73 810.28,765.98 v1(835.63,791.34) ; HL4.1@543.54,344.18 ccw(c543.54,373.6) 564.34,352.8 ccw(c585.15,332) HL4.1@555.73,332 ; HL4.1@543.54,349.19 ccw(c543.54,390.67) 572.88,361.34 ccw(c602.22,332) HL4.1@560.73,332 ; v1@826.13,791.34 cw(c803.19,791.34) 819.41,775.12 cw(c835.63,758.9) v1@835.63,781.84
SOC1: HL4.3 U1.54 | length 1712.5
  TopLayer w5: v1(795.28,791.34) 1052.57,1048.63 U1.54 ; v1@795.28,800.84 ccw(c795.28,823.77) 811.49,807.56 ccw(c827.71,791.34) v1@804.78,791.34
  BottomLayer w5: HL4.3 483.12,373.94 563.86,373.94 ; HL4.3@441.18,344.18 ccw(c441.18,373.6) 461.98,352.8 ccw(c482.78,332) HL4.3@453.37,332 ; HL4.3@441.18,349.19 ccw(c441.18,390.67) 470.52,361.34 ccw(c499.85,332) HL4.3@458.37,332 ; 564.06,373.73 795.28,604.95 v1(795.28,791.34) ; v1@788.56,784.62 cw(c772.34,768.4) 795.28,768.4 cw(c818.21,768.4) v1@801.99,784.62
SOC2: HL4.4 U1.53 | length 1780.2
  TopLayer w5: v1(754.92,791.34) v1@755.91,792.32 ; v1@754.92,792.32 v1@755.91,792.32 ; v1@754.92,800.84 ccw(c754.92,823.77) 771.14,807.56 ccw(c787.36,791.34) v1@764.42,791.34 ; 954.14,971.42 951.5,968.78 ; U1.53 1032.88,1050.16 951.5,968.78 ; v1@755.91,792.32 791.05,827.47 810.19,827.47 951.5,968.78
  BottomLayer w5: HL4.4 446.94,388.94 558.06,388.94 780.28,611.16 780.28,765.98 v1(754.92,791.34) ; HL4.4@390,344.18 ccw(c390,373.6) 410.8,352.8 ccw(c431.6,332) HL4.4@402.18,332 ; HL4.4@390,349.19 ccw(c390,390.67) 419.34,361.34 ccw(c448.67,332) HL4.4@407.18,332 ; v1@754.92,781.84 cw(c754.92,758.9) 771.14,775.12 cw(c787.36,791.34) v1@764.42,791.34
SWCLK: JP1.2 R5.1 U1.49 | length 1666.1
  TopLayer w5: U1.49 954.14,1647.5 1276.65,1970 1792,1970 R5.1 1840,1908.11 1939.4,1808.71 1939.4,1724.45 ; JP1.2@1956.98,1680.51 ccw(c1896.93,1681.97) 1939.4,1724.45 ; JP1.2@1961.98,1680.39 ccw(c1913.03,1681.58) 1947.65,1716.2 ccw(c1982.27,1750.82) JP1.2@1983.46,1701.87 ; JP1.2@1966.98,1680.26 ccw(c1929.14,1681.19) 1955.9,1707.95 ccw(c1982.67,1734.71) JP1.2@1983.59,1696.87 ; JP1.2@1983.34,1706.87 cw(c1981.88,1766.92) 1939.4,1724.45 ; JP1.2 1939.4,1724.45
SWDIO: JP1.4 R6.1 U1.46 | length 1569.4
  TopLayer w5: U1.46 973.8,1688.37 1270.43,1985 R6.1 1867.5,1957.5 1867.5,1901.82 1892.62,1876.7 JP1.4 ; JP1.4@1964.89,1857.59 ccw(c1918.75,1811.45) 1918.75,1876.7 ccw(c1918.75,1941.95) JP1.4@1964.89,1895.81 ; JP1.4@1968.42,1861.13 ccw(c1930.82,1823.52) 1930.82,1876.7 ccw(c1930.82,1929.88) JP1.4@1968.42,1892.28 ; JP1.4@1971.96,1864.66 ccw(c1942.89,1835.59) 1942.89,1876.7 ccw(c1942.89,1917.81) JP1.4@1971.96,1888.74
USBD+: JP2.3 U2.1 | length 184.7
  TopLayer w10: JP2.3 337.42,569 357,588.58 U2.1 ; JP2.3@291.78,557.22 cw(c320.21,528.79) 320.21,569 cw(c320.21,609.21) JP2.3@291.78,580.78
USBD-: JP2.2 U2.2 | length 320.6
  TopLayer w10: JP2.2@221.95,613.17 ccw(c201.99,636.58) 232.76,636.58 ; JP2.2 232.76,636.58 ; JP2.2@243.56,613.17 cw(c263.53,636.58) 232.76,636.58 ; U2.2 407,658.46 389.46,676 272.17,676 232.76,636.58
pads on no net: JP2.0 JP2.4 JP4.0 JP4.1 JP4.2 JP4.4 JP4.5 JP4.10 K2.1 K2.4 K2.5 K2.6 U1.2 U1.3 U1.4 U1.8 U1.9 U1.10 U1.11 U1.14 U1.17 U1.24 U1.25 U1.26 U1.27 U1.28 U1.29 U1.33 U1.34 U1.35 U1.36 U1.37 U1.38 U1.39 U1.40 U1.41 U1.42 U1.43 U1.44 U1.50 U1.56 U2.4 U3.0
copper on no net:
  other v2: 1080.38,659.76 1127.62,659.76 1080.38,707 1127.62,707 1080.38,754.24 1127.62,754.24

## Polygon pours and split planes (outlines as drawn)
DGND on TopLayer "TopLayer-No Net" (solid, remove dead copper, pour order 1000): 0,0 2264,0 2264,2461 0,2461 0,0
DGND on BottomLayer "TopLayer-No Net" (solid, remove dead copper, pour order 1001): 0,0 2264,0 2264,2461 0,2461 0,0

## Keep-outs
TopLayer:
  circle w5: c393.7,2332.68 r55
  circle w5: c1870.08,2332.68 r55
  circle w5: c1870.08,127.95 r55
  circle w5: c136.81,877.95 r55
BottomLayer:
  circle w5: c393.7,2332.68 r55
  circle w5: c1870.08,2332.68 r55
  circle w5: c1870.08,127.95 r55
  circle w5: c136.81,877.95 r55
KeepOutLayer:
  lines w5: 0,196.85 ccw(c196.85,196.85) 196.85,0 2066.93,0 ccw(c2066.93,196.85) 2263.78,196.85 2263.78,2263.78 ccw(c2066.93,2263.78) 2066.93,2460.63 196.85,2460.63 ccw(c196.85,2263.78) 0,2263.78 0,196.85

## Silkscreen, mask and mechanical layers (free items; w line width, h text height)
TopOverlay:
  circle w10: c2047.24,2332.68 r98.43
  circle w10: c216.54,2332.68 r98.43
  circle w10: c2047.24,127.95 r98.43
  circle w10: c216.54,127.95 r98.43
  text "R" at 2027.4,1961.69 h30
  text "D" at 2035,1863 h30
  text "G" at 2038,1764 h30
  text "C" at 2036,1664 h30
  text "V" at 2038,1566 h30
  text "B+" at 1942,472 h30 r270
  text "B-" at 1939,375 h30 r270
  text "HGD_MCU(v0.1)-20200807" at 817,112 h30
BottomOverlay:
  circle w10: c2047.24,2332.68 r98.43
  circle w10: c216.54,2332.68 r98.43
  circle w10: c2047.24,127.95 r98.43
  circle w10: c216.54,127.95 r98.43
  text "HGD_MCU(v0.1)-20200807" at 1447,112 h30

## Text inside footprints (layer, text, board x,y; h text height)
M1: BottomOverlay "GND" at 177.77,1279.02 h30 r270; BottomOverlay "GND" at 177.77,1377.44 h30 r270; BottomOverlay "GND" at 177.77,1475.87 h30 r270; BottomOverlay "ANT" at 35.06,997.52 h30 r270; BottomOverlay "M0" at 1309,1511 h30; BottomOverlay "RXD" at 1312,1310 h30; BottomOverlay "TXD" at 1313.13,1212 h30; BottomOverlay "AUX" at 1311,1113 h30; BottomOverlay "VCC" at 1306,1008 h30; BottomOverlay "GND" at 1308,911 h30